# Altium PCB PCB1_wo_gnd_plane.PcbDoc (part 1 of 2)
Units mm, origin at the board's own origin, x right, y up, seen from the top; angles counter-clockwise.
Board outline 64 x 64 mm, 2 copper layers (Top Layer, Bottom Layer), stack 1.601 mm thick; 71 components, 44 nets, 225 pads, 58 vias.
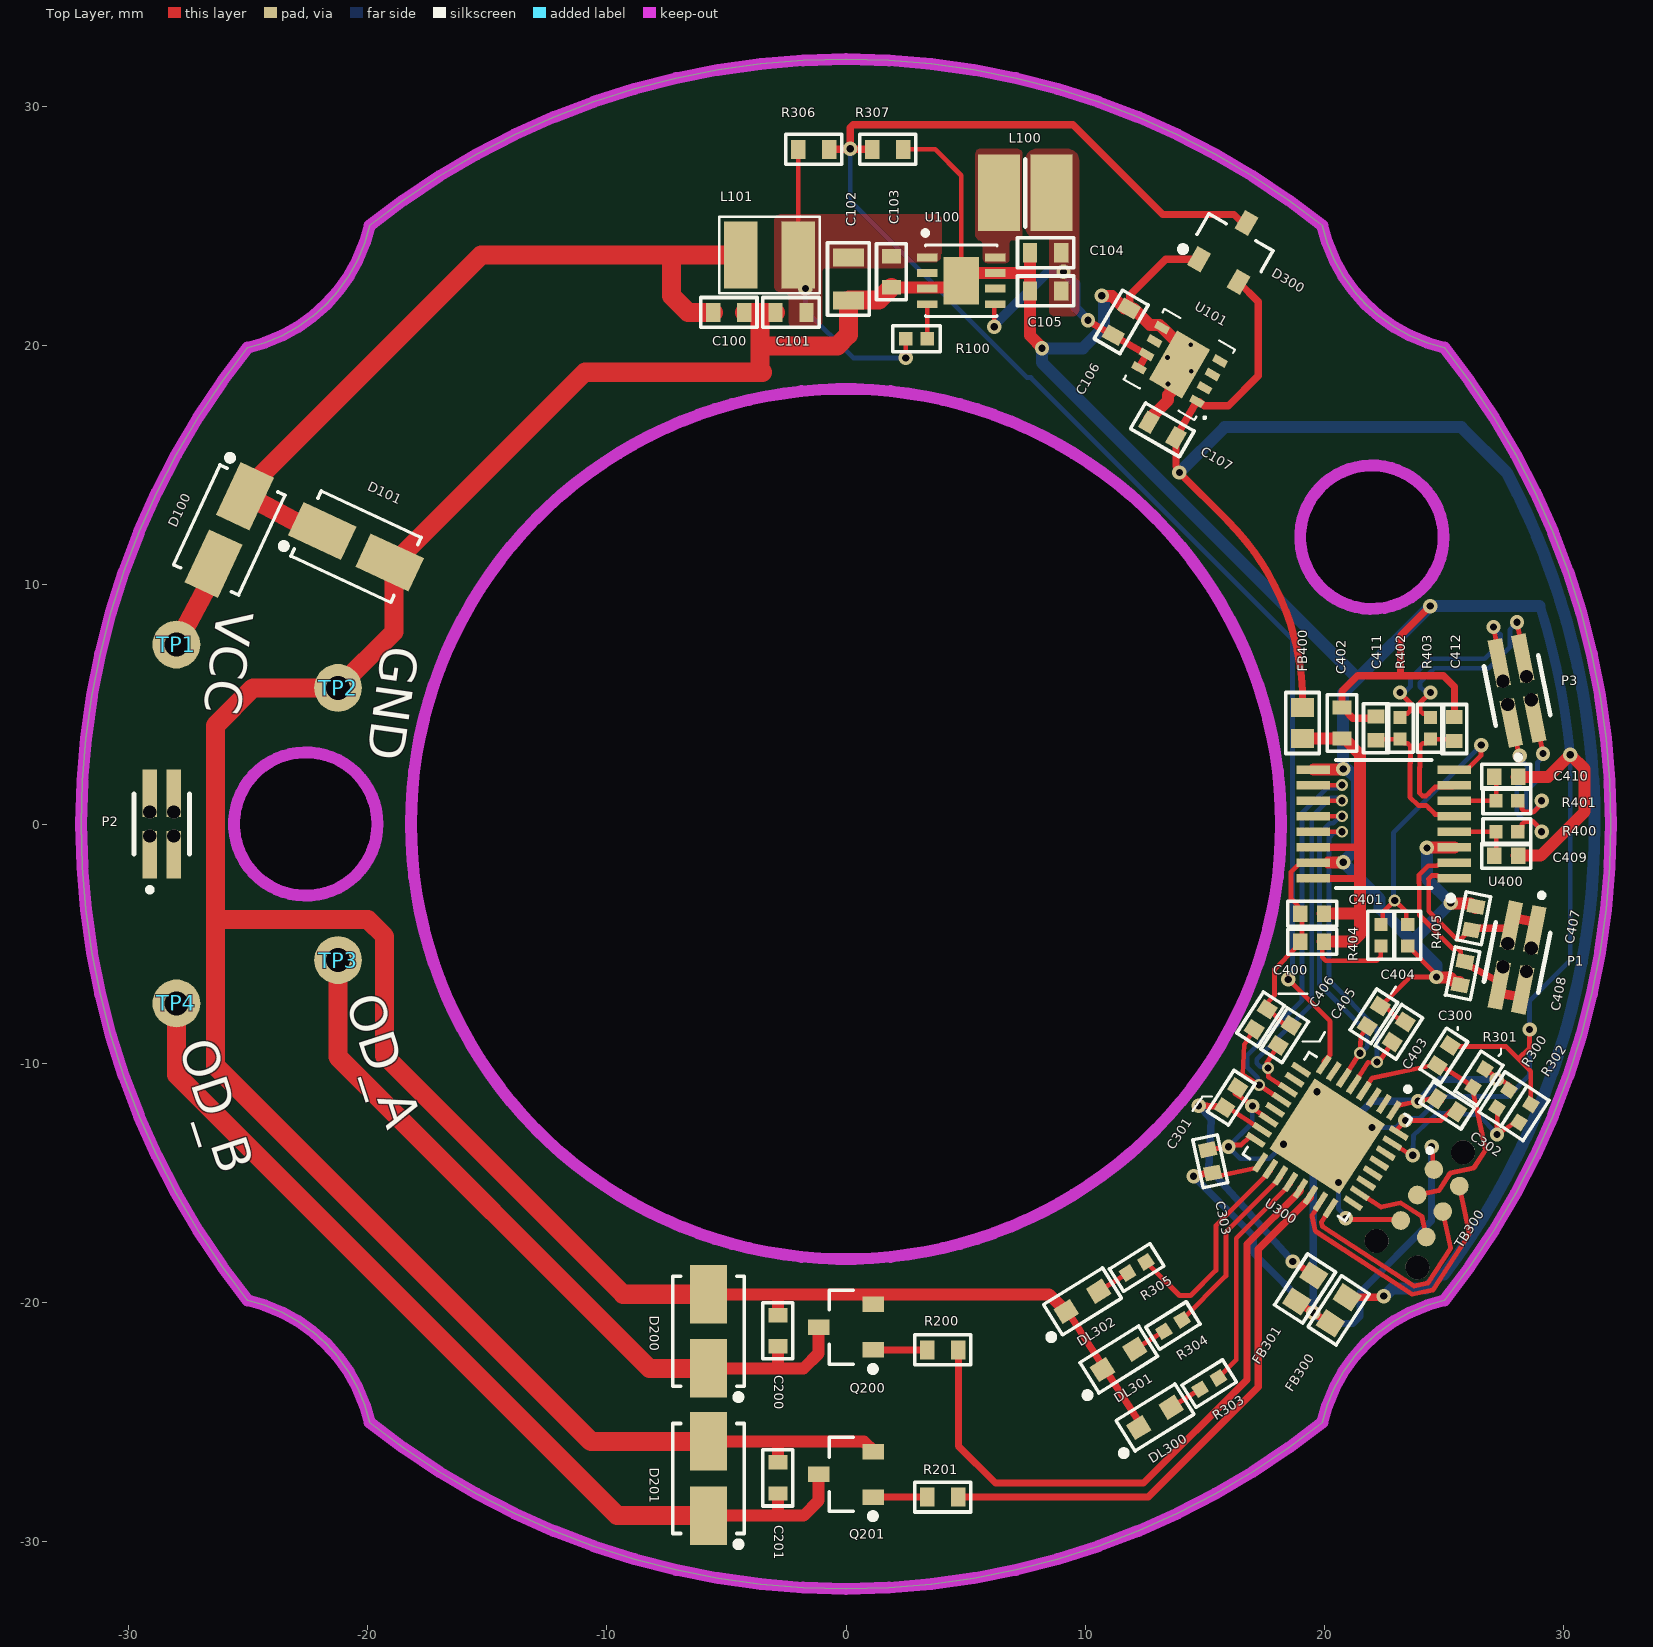
[diagram p0: Top Layer view]
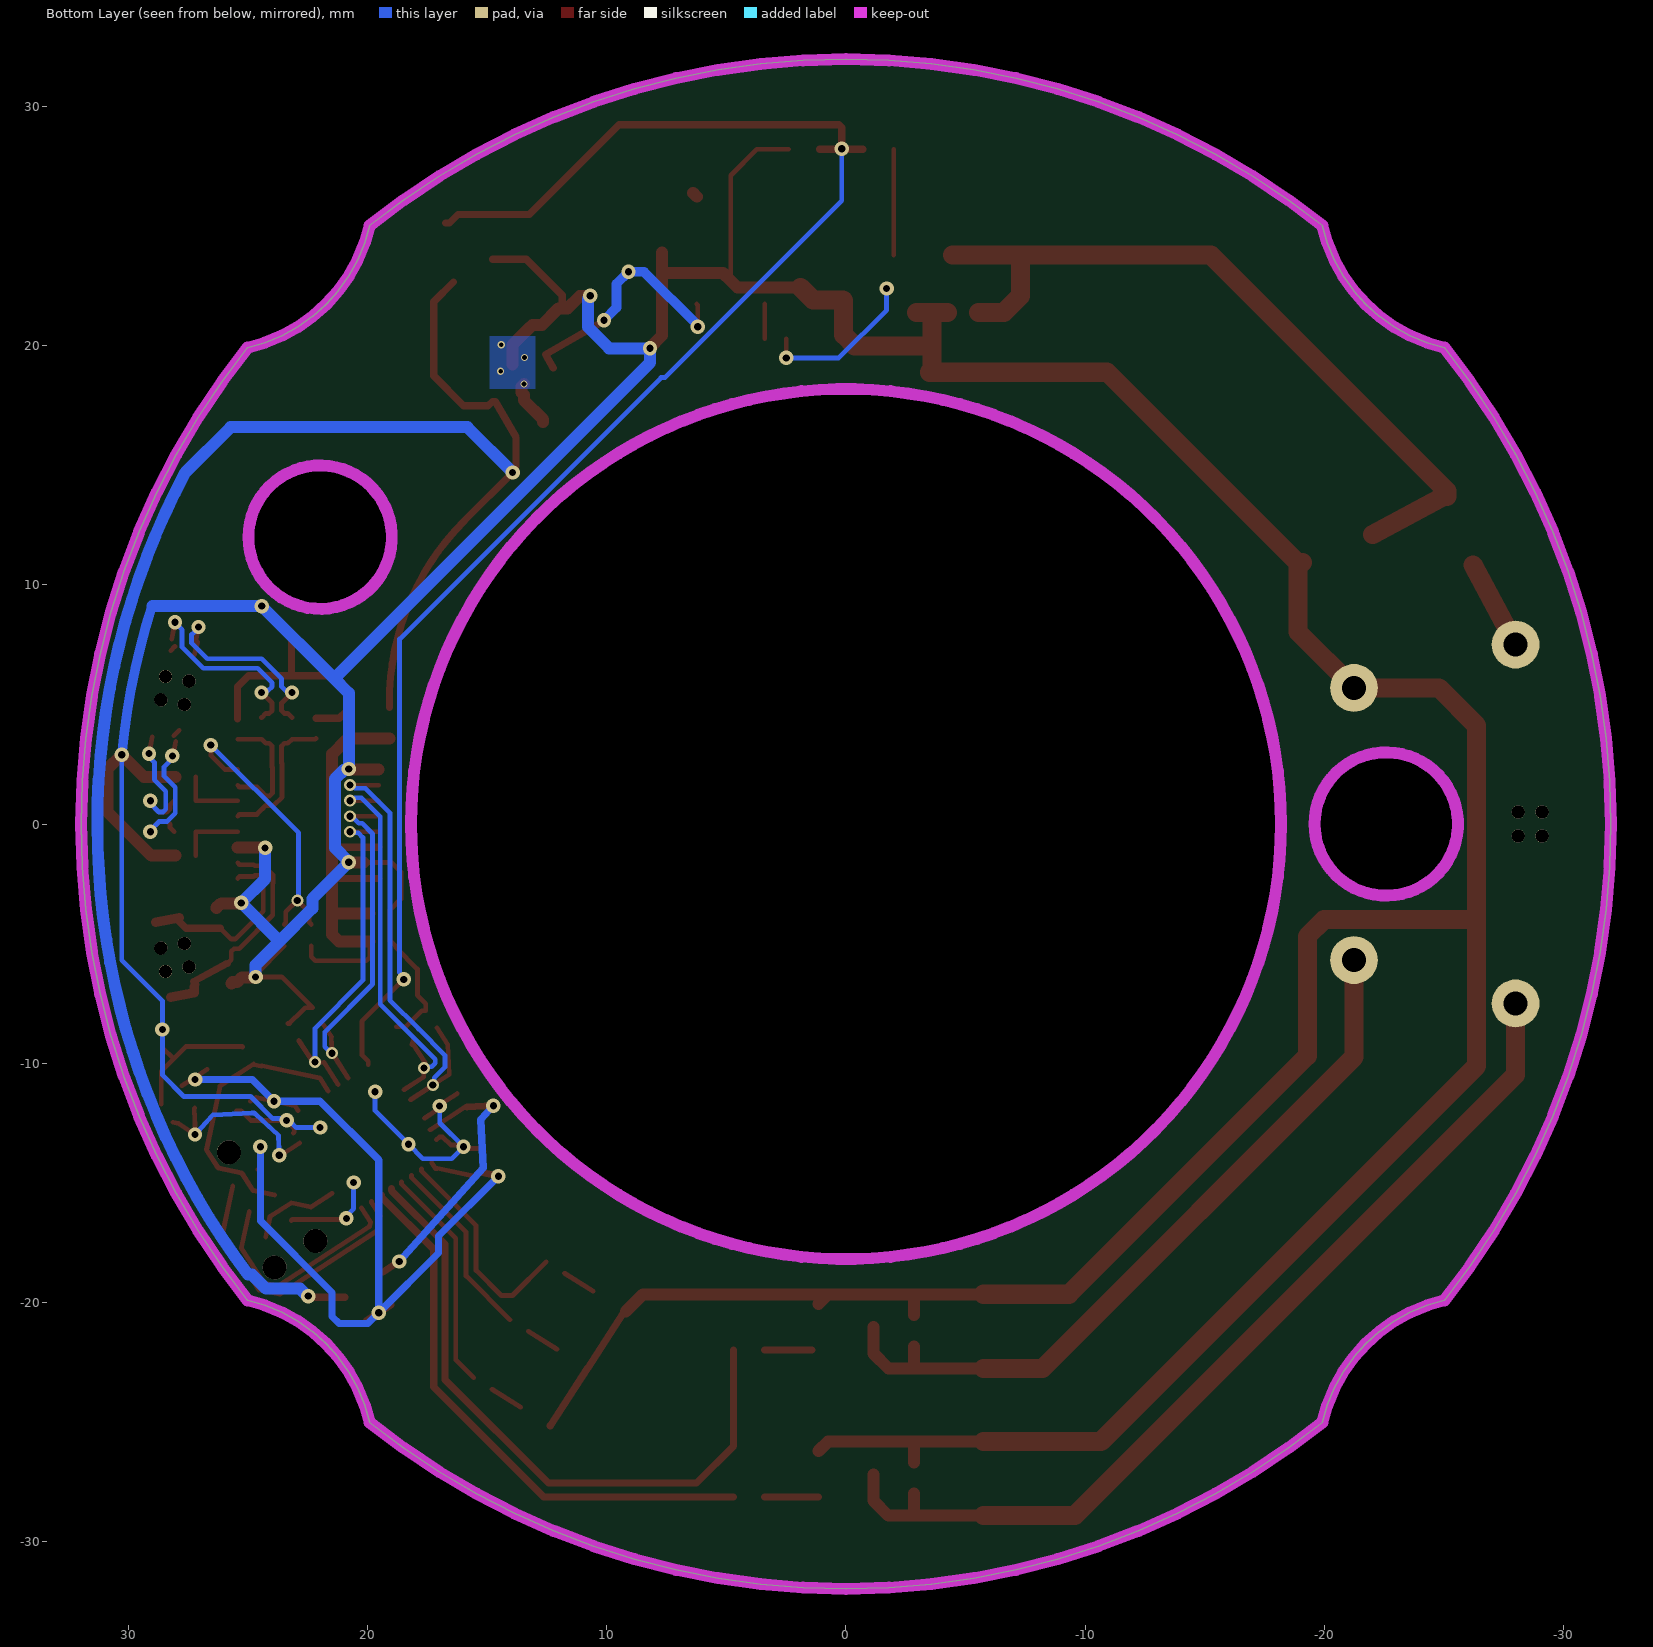
[diagram p1: Bottom Layer view, seen from below]

## Layer stack, top to bottom
Top Solder: solder mask 0.0102, Solder Resist, Dk 3.5
Top Layer: signal copper 0.0356
Dielectric 1: dielectric 1.53, FR-4, Dk 4.8
Bottom Layer: signal copper 0.0356
Bottom Solder: solder mask 0.0102, Solder Resist, Dk 3.5

## Board outline
21.744,21.744 21.237,22.311 20.797,22.932 20.429,23.599 20.14,24.303 19.931,25.035 18.498,26.112 17.006,27.107 15.462,28.017 13.868,28.839 12.232,29.57 10.556,30.209 8.848,30.752 7.112,31.2 5.354,31.549 3.578,31.799 1.792,31.95 0,32 -1.792,31.95 -3.579,31.799 -5.354,31.549 -7.112,31.2 -8.848,30.752 -10.557,30.209 -12.232,29.57 -13.868,28.839 -15.462,28.017 -17.006,27.107 -18.498,26.112 -19.931,25.035 -20.14,24.303 -20.43,23.599 -20.797,22.932 -21.237,22.311 -21.744,21.744 -22.311,21.237 -22.932,20.797 -23.599,20.429 -24.303,20.14 -25.035,19.931 -26.112,18.498 -27.107,17.006 -28.017,15.462 -28.839,13.868 -29.57,12.232 -30.209,10.557 -30.752,8.848 -31.2,7.112 -31.549,5.354 -31.799,3.579 -31.95,1.792 -32,0 -31.95,-1.792 -31.799,-3.579 -31.549,-5.354 -31.2,-7.112 -30.752,-8.848 -30.209,-10.557 -29.57,-12.232 -28.839,-13.868 -28.017,-15.462 -27.107,-17.006 -26.112,-18.498 -25.035,-19.931 -24.303,-20.14 -23.599,-20.429 -22.932,-20.797 -22.311,-21.237 -21.744,-21.744 -21.237,-22.311 -20.797,-22.932 -20.43,-23.599 -20.14,-24.303 -19.931,-25.035 -18.498,-26.112 -17.006,-27.107 -15.462,-28.017 -13.868,-28.839 -12.232,-29.57 -10.557,-30.209 -8.848,-30.752 -7.112,-31.2 -5.354,-31.549 -3.579,-31.799 -1.792,-31.95 0,-32 1.792,-31.95 3.578,-31.799 5.354,-31.549 7.112,-31.2 8.848,-30.752 10.556,-30.209 12.232,-29.57 13.868,-28.839 15.462,-28.017 17.006,-27.107 18.498,-26.112 19.931,-25.035 20.14,-24.303 20.429,-23.599 20.797,-22.932 21.237,-22.311 21.744,-21.744 22.311,-21.237 22.932,-20.797 23.599,-20.429 24.303,-20.14 25.035,-19.931 26.112,-18.498 27.107,-17.006 28.017,-15.462 28.839,-13.868 29.57,-12.232 30.209,-10.557 30.752,-8.848 31.2,-7.112 31.549,-5.354 31.799,-3.579 31.95,-1.792 32,0 31.95,1.792 31.799,3.579 31.549,5.354 31.2,7.112 30.752,8.848 30.209,10.557 29.57,12.232 28.839,13.868 28.017,15.462 27.107,17.006 26.112,18.498 25.035,19.931 24.303,20.14 23.599,20.429 22.932,20.797 22.311,21.237
cut-out: 19,12 ccw(c22,12) 22,9 ccw(c22,12) 25,12 ccw(c22,12) 22,15 ccw(c22,12)
cut-out: -22.6,-3 cw(c-22.6,0) -25.6,0 cw(c-22.6,0) -22.6,3 cw(c-22.6,0) -19.6,0 cw(c-22.6,0)
cut-out: 0,-18.2 cw(c0,0) -18.2,0 cw(c0,0) 0,18.2 cw(c0,0) 18.2,0 cw(c0,0)

## Design rules (kind name [scope] priority, off if disabled: settings)
Clearance [All] p1: gap=0.127 ignorepadtopadclearanceinfootprint=TRUE
DiffPairsRouting [All] p1: maxlimit=0.5 minlimit=0.2 mostfreqgap=0.3 toplayer_minwidth=0.2 toplayer_maxwidth=0.5 toplayer_prefwidth=0.2 bottomlayer_minwidth=0.2 bottomlayer_maxwidth=0.5 bottomlayer_prefwidth=0.2 maxuncoupledlength=12.7
MinimumSolderMaskSliver [All] p1: minsoldermaskwidth=0.127
PolygonConnect [All] p1: thpad.connectstyle=Relief thpad.reliefconductorwidth=0.254 thpad.reliefentries=4 thpad.polygonreliefangle="90 Angle" thpad.airgapwidth=0.254 smdpad.connectstyle=Relief smdpad.reliefconductorwidth=0.254 smdpad.reliefentries=4 smdpad.polygonreliefangle="90 Angle" smdpad.airgapwidth=0.254 via.connectstyle=Direct via.reliefconductorwidth=0.254 via.reliefentries=4 via.polygonreliefangle="90 Angle" via.airgapwidth=0.254
RoutingVias [All] p1: holewidth=0.7 width=1 viastyle="Through Hole" minholewidth=0.25 minwidth=0.5 maxholewidth=0.3 maxwidth=0.6
SilkToSilkClearance [All] p1: silktosilkclearance=0.127
SilkToSolderMaskClearance [IsPad] p1: minsilkscreentomaskgap=0.065 clearancetoexposedcopper=TRUE
SolderMaskExpansion [All] p1: expansion=0 istentingtop=FALSE
SupplyNets "Schematic Supply Nets_7" [InNet('Buck_Vin')] p1: voltage=0.000
SupplyNets "Schematic Supply Nets_6" [InNet('3V3_MCU')] p2: voltage=0.000
SupplyNets "Schematic Supply Nets_3" [InNet('VDDA_MCU')] p3: voltage=0.000
SupplyNets "Schematic Supply Nets_5" [InNet('3V3_LDC')] p4: voltage=0.000
SupplyNets "Schematic Supply Nets_4" [InNet('3V3')] p5: voltage=0.000
SupplyNets "Schematic Supply Nets_2" [InNet('GND')] p6: voltage=0.000
SupplyNets "Schematic Supply Nets_1" [InNet('V_SUPPLY')] p7: voltage=0.000
SupplyNets "Schematic Supply Nets" [InNet('5V')] p8: voltage=0.000
Width [All] p1: maxlimit=0.8 minlimit=0.2 preferedwidth=0.3 minimp=50.000000 maximp=50.000000 favimp=50.000000
26 further rules are at their usual default settings.

## Classes and differential pairs
component class MCU: C300 C301 C302 C303 D300 DL300 DL301 DL302 FB300 FB301 R300 R301 R302 R303 R304 R305 R306 R307 TB300 U300
component class COIL_IF: C400 C401 C402 C403 C404 C405 C406 C407 C408 C409 C410 C411 C412 FB400 R400 R401 R402 R403 R404 R405 U400
component class PWR: C100 C101 C102 C103 C104 C105 C106 C107 D100 D101 L100 L101 R100 U100 U101
component class OUT_DRV: C200 C201 D200 D201 Q200 Q201 R200 R201
component class main: P1 P2 P3 TP1 TP2 TP3 TP4
differential pair SIN: +SIN_P -SIN_N
differential pair RX_SIN_FILT: +RX_SIN_FILT_P -RX_SIN_FILT_N
differential pair RX_COS_FILT: +RX_COS_FILT_P -RX_COS_FILT_N
differential pair COS: +COS_P -COS_N
differential pair TX: +TX_P -TX_N
differential pair RX_SIN: +RX_SIN_P -RX_SIN_N
differential pair RX_COS: +RX_COS_P -RX_COS_N

## Components (designator, comment, footprint, x,y, rotation, side; value= is the part's Value field where it differs from the comment)
C100 "100nF" CER0603 -4.9,21.4 r0 top
C101 "100nF" CER0603 -2.3,21.4 r180 top
C102 "1uF" CER0805 0.1,22.8 r270 top
C103 "100nF" CER0603 1.9,23.1 r270 top
C104 "100nF" CER0603 8.35,23.9 r180 top
C105 "2.2uF" CER0603 8.35,22.3 r180 top
C106 "2.2uF" CER0603 11.514,21.006 r60 top
C107 "2.2uF" CER0603 13.237,16.49 r150 top
C200 "10nF" CER0603 -2.85,-21.2 r90 top
C201 "10nF" CER0603 -2.85,-27.356 r90 top
C300 "100nF" CER0402 25.011,-9.684 r57 top locked
C301 "100nF" CER0402 16.114,-11.449 r57 top locked
C302 "100nF" CER0402 25.144,-11.769 r327 top
C303 "100nF" CER0402 15.237,-14.111 r102 top locked
C400 "100nF" CER0402 19.5,-4.925 r180 top locked
C401 "10nF" CER0402 19.5,-3.75 r180 top locked
C402 "1uF" CER0603 20.75,4.225 r90 top
C403 "1nF" CER0402 23.127,-8.697 r57 top
C404 "1nF" CER0402 22.084,-8.042 r57 top
C405 "1nF" CER0402 18.35,-8.841 r57 top
C406 "1nF" CER0402 17.346,-8.169 r57 top
C407 "470pF" CER0402 26.256,-3.942 r78.75 top
C408 "470pF" CER0402 25.797,-6.25 r258.75 top
C409 "470pF" CER0402 27.625,-1.325 r0 top locked
C410 "470pF" CER0402 27.625,1.975 r0 top locked
C411 "470pF" CER0402 22.175,4 r90 top locked
C412 "470pF" CER0402 25.45,3.975 r90 top locked
D100 "Shottky Rect Diode SMD" DO-214AC_SMA -25.8,12.3 r245 top value=RBR1L60ADDTE25
D101 "SMD/PTH TVS Unidirectional Diode" DO-214AC_SMA -20.5,11.6 r335 top value=SMAJ28A
D200 "SMD/PTH TVS Unidirectional Diode" DO-214AC_SMA -5.75,-21.225 r90 top value="TVS 28V SMA"
D201 "SMD/PTH TVS Unidirectional Diode" DO-214AC_SMA -5.75,-27.381 r90 top value="TVS 28V SMA"
D300 "Double Schottky Diode, SOT23-3 series" SOT95P230X110-3N 16.175,24.15 r60 top value=BAT54S
DL300 "Single Color SMD LED" "LED SMD 0603" 12.926,-24.826 r32 top value=LEDR
DL301 "Single Color SMD LED" "LED SMD 0603" 11.409,-22.399 r32 top value=LEDG
DL302 "Single Color SMD LED" "LED SMD 0603" 9.892,-19.971 r32 top value=LEDG
FB300 "Value" FEB0603 20.613,-20.345 r237 top
FB301 "Value" FEB0603 19.209,-19.432 r57 top
FB400 "Value" FEB0603 19.1,4.225 r270 top
L100 "SMD Inductor" WE-MAPI_1212 7.5,26.4 r0 top value=3.3uH
L101 "SMD Inductor" WE-LQ_1210 -3.2,23.8 r0 top value=4.7uH
P1 "CLM-102-02-L-D-BE" SAMTEC_CLM-102-02-X-D-BE_SPECIAL 28.075,-5.584 r168.75 top locked
P2 "CLM-102-02-L-D-BE" SAMTEC_CLM-102-02-X-D-BE_SPECIAL -28.625,0 r0 top locked
P3 "CLM-102-02-L-D-BE" SAMTEC_CLM-102-02-X-D-BE_SPECIAL 28.075,5.584 r11.25 top locked
Q200 "NPN Transistor SMD" SOT95P230X110-3N 0,-21.05 r180 top value=BC847C-Q
Q201 "NPN Transistor SMD" SOT95P230X110-3N 0,-27.206 r180 top value=BC847C-Q
R100 "SMD Resistor" Res0402 2.95,20.3 r180 top value=10K
R200 "SMD Resistor" Res0603 4.05,-22 r180 top value=1k
R201 "SMD Resistor" Res0603 4.05,-28.156 r180 top value=1k
R300 "SMD Resistor" Res0402 27.486,-11.504 r57 top locked value=10K
R301 "SMD Resistor" Res0402 26.478,-10.637 r57 top locked value=10K
R302 "SMD Resistor" Res0402 28.405,-12.103 r237 top locked value=10K
R303 "SMD Resistor" Res0402 15.194,-23.409 r32 top value=249R
R304 "SMD Resistor" Res0402 13.678,-20.981 r32 top value=249R
R305 "SMD Resistor" Res0402 12.161,-18.554 r32 top value=249R
R306 "SMD Resistor" Res0603 -1.35,28.225 r180 top value=33K
R307 "SMD Resistor" Res0603 1.75,28.225 r180 top value=3K3
R400 "SMD Resistor" Res0402 27.65,-0.325 r180 top locked value=100R
R401 "SMD Resistor" Res0402 27.65,0.975 r180 top locked value=100R
R402 "SMD Resistor" Res0402 23.175,4 r270 top locked value=100R
R403 "SMD Resistor" Res0402 24.45,4 r270 top locked value=100R
R404 "SMD Resistor" Res0402 22.375,-4.65 r270 top value=1K
R405 "SMD Resistor" Res0402 23.5,-4.65 r90 top value=1K
TB300 "TC2030_NL" TC2030_NL 24.594,-14.457 r237 top locked value=TC2030-NL
TP1 "Term Pole" "Terminale 508-0685_2mm" -28.012,7.506 r345 top
TP2 "Term Pole" "Terminale 508-0685_2mm" -21.25,5.694 r75 top
TP3 "Term Pole" "Terminale 508-0685_2mm" -21.25,-5.694 r105 top
TP4 "Term Pole" "Terminale 508-0685_2mm" -28.012,-7.506 r105 top
U100 "ONSEMI_NCV890430" SON65P300X300X100-9N 4.82,22.725 r0 top value=NCV890430
U101 "TI_TPS78533Q_VSON" SON65P300X100_HS-9N 13.95,19.225 r150 top value=TPS78433-Q1
U300 "STM32G431K8U6" QFN50P500X500X60-33N 20.128,-13.071 r237 top locked value=STM32G431
U400 "LDC5072EPWRQ1" TSSOP16-PW_TEX 22.5,0 r180 top locked value=LDC5072

## Footprints (in the part's own frame and the unit in brackets; to place one, negate y for a bottom-side part, rotate by r counter-clockwise, add the part's x,y. Pads: shape width x height; smd on the part's side, far side on the other; paste and mask are expansions set on the pad)
CER0402 [mm] "CAPC1005X04N"
  rect 0.6x0.7 smd: 1(-0.5,0) 2(0.5,0)
  silkscreen extent -1.03,-0.53 1.03,0.53, body extent -0.5,-0.3 0.5,0.3, height 0.19
CER0603 [mm] "CAPC1608X05N"
  rect 0.6x0.8 smd: 1(-0.65,0) 2(0.65,0)
  silkscreen extent -1.17,-0.63 1.17,0.63, body extent -0.8,-0.4 0.8,0.4, height 0.29
CER0805 [mm]
  rect 0.76x1.3 smd: 1(-0.9,0) 2(0.9,0)
  silkscreen extent -1.53,-0.87 1.52,0.87, body extent -1,-0.62 1,0.63, height 0.77
DO-214AC_SMA [mm] "Molded Diode, 2-Leads, Body 4,30x2,60mm, IPC Medium Density"
  rect 2.45x1.55 smd: 1(-1.55,0) 2(1.55,0)
  silkscreen extent -2.87,-1.5 2.3,1.5, body extent -2.75,-1.4 2.75,1.4, height 2.6
FEB0603 [mm] "FEBC1608X05N"
  rect 0.8x0.95 smd: 1(-0.65,0) 2(0.65,0)
  silkscreen extent -1.28,-0.7 1.28,0.7, body extent -0.8,-0.4 0.8,0.4, height 0.79
"LED SMD 0603" [mm] "LED 0603(1.6x0.8mm)"
  rect 0.8x0.75 smd: 1(-0.8,0) 2(0.8,0)
  silkscreen extent -2.02,-0.75 1.45,0.75, body extent -0.85,-0.45 0.85,0.45, height 0.9
QFN50P500X500X60-33N [mm]
  rrect25% 0.86x0.25 smd: 1(-2.435,1.75) 2(-2.435,1.25) 3(-2.435,0.75) 4(-2.435,0.25) 5(-2.435,-0.25) 6(-2.435,-0.75) 7(-2.435,-1.25) 8(-2.435,-1.75) 17(2.435,-1.75) 18(2.435,-1.25) 19(2.435,-0.75) 20(2.435,-0.25) 21(2.435,0.25) 22(2.435,0.75) 23(2.435,1.25) 24(2.435,1.75)
  rrect25% 0.25x0.86 smd: 9(-1.75,-2.435) 10(-1.25,-2.435) 11(-0.75,-2.435) 12(-0.25,-2.435) 13(0.25,-2.435) 14(0.75,-2.435) 15(1.25,-2.435) 16(1.75,-2.435) 25(1.75,2.435) 26(1.25,2.435) 27(0.75,2.435) 28(0.25,2.435) 29(-0.25,2.435) 30(-0.75,2.435) 31(-1.25,2.435) 32(-1.75,2.435)
  rect 3.5x3.5 smd paste-0.64: 33(0,0)
  silkscreen extent -3.59,-2.55 2.55,2.55, body extent -2.5,-2.5 2.5,2.5, height 0.6
Res0402 [mm] "RESC1005X04N"
  rect 0.55x0.55 smd: 1(-0.45,0) 2(0.45,0)
  silkscreen extent -1,-0.55 1,0.55, body extent -0.5,-0.25 0.5,0.25, height 0.34
Res0603 [mm] "RESC1608X05N"
  rect 0.6x0.8 smd: 1(-0.65,0) 2(0.65,0)
  silkscreen extent -1.17,-0.63 1.17,0.63, body extent -0.8,-0.4 0.8,0.4, height 0.44
SAMTEC_CLM-102-02-X-D-BE_SPECIAL [mm]
  rect 0.61x2 smd paste+0 mask+0.102: 01(-0.5,-1.286) 02(-0.5,1.286) 03(0.5,-1.286) 04(0.5,1.286)
  round 0.559 hole 0.559 mask+0: 01(-0.5,-0.5) 02(-0.5,0.5) 03(0.5,-0.5) 04(0.5,0.5)
  silkscreen extent -1.16,-2.85 1.16,1.27, body extent -1.16,-1.91 1.16,1.91, height 2.22
SON65P300X100_HS-9N [mm] "SON, 8-Leads, Body 3,00x3,00mm, Pitch 0,65mm, Thermal Pad 2,37x1,60mm, IPC Medium Density"
  rect 0.6x0.32 smd: 1(-1.4,0.975) 2(-1.4,0.325) 3(-1.4,-0.325) 4(-1.4,-0.975) 5(1.4,-0.975) 6(1.4,-0.325) 7(1.4,0.325) 8(1.4,0.975)
  rect 1.6x2.37 smd paste-2539.97: 9(0,0)
  silkscreen extent -2.07,-1.7 1.7,1.7, body extent -1.49,-1.49 1.51,1.51, height 1
SON65P300X300X100-9N [mm]
  rrect5% 0.87x0.32 smd paste+0 mask+0: 1(-1.42,0.975) 2(-1.42,0.325) 3(-1.42,-0.325) 4(-1.42,-0.975) 5(1.42,-0.975) 6(1.42,-0.325) 7(1.42,0.325) 8(1.42,0.975)
  rect 1.47x2 smd paste-2 mask+0.05: 9(0,0)
  silkscreen extent -1.6,-1.5 1.5,2.1, body extent -1.5,-1.5 1.5,1.5, height 1
SOT95P230X110-3N [mm] "SOT23-3"
  rect 0.9x0.65 smd: 1(-1.15,0.95) 2(-1.15,-0.95) 3(1.15,0)
  silkscreen extent -1.25,-1.55 0.7,1.87, body extent -1.5,-1.5 1.5,1.5, height 1.3
TC2030_NL [mm]
  round 0.78 smd paste-1: 1(0,0) 2(0,1.27) 3(1.27,0) 4(1.27,1.27) 5(2.54,0) 6(2.54,1.27)
  round 1 hole 1 unplated: ""(-1.27,0.635) ""(3.81,-0.385) ""(3.81,1.655)
  silkscreen extent -0.63,-0.63 -0.52,-0.52
"Terminale 508-0685_2mm" [mm] "Terminale sonda TH"
  round 2 hole 1: 1(0,0)
TSSOP16-PW_TEX [mm]
  rect 1.404x0.355 smd paste+0 mask+0: 1(-2.95,2.275) 2(-2.95,1.625) 3(-2.95,0.975) 4(-2.95,0.325) 5(-2.95,-0.325) 6(-2.95,-0.975) 7(-2.95,-1.625) 8(-2.95,-2.275) 9(2.95,-2.275) 10(2.95,-1.625) 11(2.95,-0.975) 12(2.95,-0.325) 13(2.95,0.325) 14(2.95,0.975) 15(2.95,1.625) 16(2.95,2.275)
  silkscreen extent -2.9,-2.68 2,3.2, body extent -3.3,-2.55 3.3,2.55, height 1.2
WE-LQ_1210 [mm] "SMT Inductor, body 3.2x2.5mm"
  rect 1.4x2.8 smd: 1(-1.2,0) 2(1.2,0)
  silkscreen extent -2.1,-1.6 2.1,1.6, body extent -1.6,-1.25 1.6,1.25, height 1.99
WE-MAPI_1212 [mm]
  rect 1.75x3.2 smd: 1(-1.1,0) 2(1.1,0)
  silkscreen extent 0,-1.4 0,1.4, body extent -1.5,-1.5 1.5,1.5, height 1

## Part data
C100 C101 C103 C104: library part GCM188L81H104KA57D, "MLCC Automotive, 100nF, 0603, 50V, 10%, X8L", Case/Package=0603, Dielectric=X8L, Max Op# temp °C=150, Min Op# Temp °C=-55, MPN2=GCJ188L8EL104KA07, Op Voltage=50V, Supplier Part Number=81-GCM188L81H104KA7D, Tolerance=10%, Datasheet URL=https://www.mouser.it/datasheet/2/281/1/GCM188L81H104KA57_01A-3144042.pdf, MFG1=MURATA, MFG2=MURATA, MPN1=GCM188L81H104KA57D, Qualification=AEC-Q200, Supplier=Mouser, Supplier URL=https://www.mouser.it/ProductDetail/Murata-Electronics/GCM188L81H104KA57J?qs=yTuLhIm%2Fv1CdnQNNqnCjYQ%3D%3D, Technology="Powertrain/Safety for Automotive", Termination="Soft (GCJ)"
C102: library part KAM21KR71H105KL, "MLCC Automotive, 1uF, 0805, 50V, 10%, X7R", Case/Package=0805, Dielectric=X7R, Max Op# temp °C=125, Min Op# Temp °C=-55, Op Voltage=50V, Supplier Part Number=581-KAM21KR71H105KL, Tolerance=10%, Datasheet URL=https://www.mouser.it/datasheet/2/40/AutoMLCC-2952695.pdf, MFG1=KYOCERA-AVX, MPN1=KAM21KR71H105KL, Qualification=AEC-Q200, Supplier=Mouser, Supplier URL=https://www.mouser.it/ProductDetail/KYOCERA-AVX/08055C105K4T4A?qs=byeeYqUIh0Oh891bMlItEA%3D%3D, Technology="Powertrain/Safety for Automotive"
C105 C106 C107: library part GRT188C71C225KE13D, "MLCC Automotive, 2.2uF, 0603, 16V, 10%, X7S", Case/Package=0603, Dielectric=X7S, Max Op# temp °C=125, Min Op# Temp °C=-55, Op Voltage=16V, Supplier Part Number=81-GRT188C71C225KE3D, Tolerance=10%, Datasheet URL=https://www.mouser.it/datasheet/3/76/1/GRT188C71C225KE13_01A.pdf, MFG1=MURATA, MPN1=GRT188C71C225KE13D, Qualification=AEC-Q200, Supplier=Mouser, Supplier URL=https://www.mouser.it/it/ProductDetail/Murata-Electronics/GRT188C71C225KE13D?qs=hd1VzrDQEGhlNcWcmqnE6Q%3D%3D
C200 C201: library part GCM188R72A103KA37, "MLCC Automotive, 10nF, 0603, 100V, 10%, X7R", Case/Package=0603, Dielectric=X7R, Max Op# temp °C=125, Min Op# Temp °C=-55, Op Voltage=100V, Supplier Part Number=81-GCM188R72A103KA7D, Tolerance=10%, Datasheet URL=https://www.mouser.it/datasheet/2/281/1/GCM188R72A103KA37_01C-3144519.pdf, MFG1=MURATA, MPN1=GCM188R72A103KA37, Qualification=AEC-Q200, Supplier=Mouser, Supplier URL=https://www.mouser.it/ProductDetail/Murata-Electronics/GCM188R72A103KA37D?qs=aEuGZpxfbxXMjTExujWHsg%3D%3D, Technology="Powertrain/Safety for Automotive"
C300 C301 C302 C303 C400: library part GCM155R71H104KE02D, "MLCC Automotive, 100nF, 0402, 50V, 10%, X7r", Case/Package=0402, Dielectric=X7R, Max Op# temp °C=125, Min Op# Temp °C=-55, MPN2=GCM155R71H104KE37, Op Voltage=50V, Supplier Part Number=81-GCM155R71H104KE2D, Tolerance=10%, Datasheet URL=https://www.mouser.it/datasheet/2/281/1/GCM155R71H104KE02_01A-3142168.pdf, MFG1=MURATA, MFG2=MURATA, MPN1=GCM155R71H104KE02D, Qualification=AEC-Q200, Supplier=Mouser, Supplier URL=https://www.mouser.it/ProductDetail/Murata-Electronics/GCM155R71H104KE02D?qs=hNud%2FORuBR2sLZsqfoz4Fw%3D%3D, Technology="Powertrain/Safety for Automotive"
C401: library part GCM155R71H103KA55*, "MLCC Automotive, 10nF, 0402, 25V, 10%, X7r", Case/Package=0402, Dielectric=X7R, Max Op# temp °C=125, Min Op# Temp °C=-55, Op Voltage=50V, Supplier Part Number=81-GCM155R71H103KA5J, Tolerance=10%, Datasheet URL=https://www.mouser.it/datasheet/2/281/1/GCM155R71H103KA55_01A-3142380.pdf, MFG1=MURATA, MPN1=GCM155R71H103KA55*, Qualification=AEC-Q200, Supplier=Mouser, Supplier URL=https://www.mouser.it/ProductDetail/Murata-Electronics/GCM155R71H103KA55J?qs=N3Kl9KD794RolAwdnyzU1Q%3D%3D, Technology="Powertrain/Safety for Automotive"
C402: library part GCM188R71C105KA64J, "MLCC Automotive, 1uF, 0603, 16V, 10%, X7R", Case/Package=0603, Dielectric=X7R, Max Op# temp °C=125, Min Op# Temp °C=-55, MPN2=C0603C105K4RACAUTO, Op Voltage=16V, Supplier Part Number=81-GCM188R71C105KA4J, Tolerance=10%, Datasheet URL=https://www.mouser.it/datasheet/2/281/1/GCM188R71C105KA64_04A-3143889.pdf, MFG1=MURATA, MFG2=KEMET, MPN1=GCM188R71C105KA64J, Qualification=AEC-Q200, Supplier=Mouser, Supplier URL=https://www.mouser.it/ProductDetail/Murata-Electronics/GCM188R71C105KA64J?qs=4%252BGqC78dy0BN5WaW5TLgXw%3D%3D, Technology="Powertrain/Safety for Automotive"
C403 C404 C405 C406: library part GRT1555C1E102JA02J, "MLCC Automotive, 1nF, 0402, 25V, 10%, COG", Case/Package=0402, Dielectric=C0G, Max Op# temp °C=125, Min Op# Temp °C=-55, Op Voltage=25V, Supplier Part Number=81-GRT1555C1E102JA2J, Tolerance=5%, Datasheet URL=https://www.mouser.it/datasheet/3/76/4/GRT1555C1E102JA02_01A.pdf, MFG1=MURATA, MPN1=GRT1555C1E102JA02J, Qualification=AEC-Q200, Supplier=Mouser, Supplier URL=https://www.mouser.it/it/ProductDetail/Murata-Electronics/GRT1555C1E102JA02J?qs=sGAEpiMZZMvsSlwiRhF8qtsGU%2FCnaNeQokeRzBpVly3nnJVQ2ndM9w%3D%3D
C407 C408 C409 C410 C411 C412: library part GCM1555C1H471JA16, "MLCC Automotive, 470pF, 0402, 50V, 5%, COG", Case/Package=0402, Dielectric=COG, Max Op# temp °C=125, Min Op# Temp °C=-55, Op Voltage=50V, Supplier Part Number=81-GCM1555C1H471JA6J, Tolerance=5%, MFG1=MURATA, MPN1=GCM1555C1H471JA16, Qualification=AEC-Q200, Supplier=Mouser, Supplier URL=https://www.mouser.it/ProductDetail/Murata-Electronics/GCM1555C1H471JA16J?qs=N3Kl9KD794TXvw4%2Fs7azFA%3D%3D, Technology="Powertrain/Safety for Automotive"
D100: library part RBR1L60ADDTE25, "Schottky Rectifier Diode 1A 60V SMA", Case/Package=SMA(DO-214AC), Max Op# temp °C=150, Min Op# Temp °C=-55, Supplier Part Number=755-RBR1L60ADDTE25, Datasheet URL=https://www.rohm.com/datasheet?p=RBR1L60ADD&dist=Mouser&media=referral&source=mouser.com&campaign=Mouser, If (A)=1A, MFG1=ROHM, MPN1=RBR1L60ADDTE25, Qualification=AEC-Q101, Supplier=Mouser, Supplier URL=https://www.mouser.it/it/ProductDetail/ROHM-Semiconductor/RBR1L60ADDTE25?qs=4v%252BiZTmLVHHPf04ac7QKmA%3D%3D, Vreverse=60V
D101: library part SMAJ28A-13-F, "TVS Unidir 28V SMA", MPN1=SMAJ28A-13-F
D200 D201: library part SMA6T28AY, "TVS Uniir 28V SMA", 8/20us Power=4KW, 10/1000us Power=0.6Kw, Case/Package=SMA/DO-214AC, Max Op# temp °C=150, Min Op# Temp °C=-55, Stand-Off Voltage=24V, Supplier Part Number=511-SMA6T28AY, Datasheet URL=https://www.mouser.it/datasheet/2/389/sma6ty-1850088.pdf, MFG1=ST, MPN1=SMA6T28AY, Qualification=AEC-Q101, Supplier=Mouser, Supplier URL=https://www.mouser.it/ProductDetail/STMicroelectronics/SMAJ30A-TR?qs=zr%2F4QzOm779pW41kykOibw%3D%3D, Type=Unidirectional
D300: library part BAT54S, "Dual Schottky Diode,  Dual Series, SOT23, 0.2A, 30V", Case/Package="SOT323-3 (SC70)", MPN2=BAT54SLT1G, If (A)=0.2, MFG1=NEXPERIA, MFG2=OnSemi, MPN1=BAT54S, Type="Dual Series A1K2C", Vreverse=30V
DL300: library part SML-D12U8WT86C, "LED standard - SMD Red 620nm 63mcd 2.2 V, 20mA, 0603 AECQ-102", Case/Package="0603-Top View", Color="red 620nm", Max Current@ Tmax=4mA, Max Op# temp °C=100, Min Op# Temp °C=-40, Power Diss (mW)=54mW, Supplier Part Number=755-SML-D12U8WT86C, Datasheet URL=https://fscdn.rohm.com/en/products/databook/datasheet/opto/led/chip_mono/sml-d12u8wt86(c)-e.pdf, MFG1=ROHM, MPN1=SML-D12U8WT86C, Qualification=AEC-Q101, Supplier=Mouser, Supplier URL=https://www.mouser.it/ProductDetail/ROHM-Semiconductor/SML-D12U8WT86C?qs=HXFqYaX1Q2wNcb%2FPJz96zg%3D%3D, Technology=SM, Vf="2V @4mA"
DL301 DL302: library part SML-D12P8WT86C, "LED standard - SMD Grn 560nm 6.3mcd 2.2 V, 20mA, 0603 AECQ-102", Case/Package="0603-Top View", Color="Green 560nm", Max Current@ Tmax=4mA, Max Op# temp °C=100, Min Op# Temp °C=-40, Power Diss (mW)=54mW, Supplier Part Number=755-SML-D12P8WT86C, Datasheet URL=https://fscdn.rohm.com/en/products/databook/datasheet/opto/led/chip_mono/sml-d12p8wt86(c)-e.pdf, MFG1=ROHM, MPN1=SML-D12P8WT86C, Qualification=AEC-Q101, Supplier=Mouser, Supplier URL=https://www.mouser.it/ProductDetail/ROHM-Semiconductor/SML-D12P8WT86C?qs=HXFqYaX1Q2wFepzn1zWRrg%3D%3D, Technology=SM, Vf="2V @4mA"
FB300 FB301 FB400: library part BLM18HE601SH1D, "SMD EMI Suppression Ferrite Bead 600R, 0603, For DC Power", Case/Package=0603, Max Op# temp °C=125, Min Op# Temp °C=-55, Rated Current @85°C=0.8A, Rated Current @125°C=0.6A, Supplier Part Number=81-BLM18HE601SH1D, Datasheet URL=https://www.murata.com/products/productdata/8796199452702/QNFA9104.pdf?1539737628000, DCR (mR)=125, Impedence @1GHz=600R, Impedence @100MHz=600R, MFG1=MURATA, MPN1=BLM18HE601SH1D, Supplier=Mouser, Supplier URL=https://www.mouser.it/ProductDetail/Murata-Electronics/BLM18HE601SH1D?qs=d0WKAl%252BL4KZJDOgHon8ecQ%3D%3D, Technology=AEC-Q200
L100: library part 74438333033, "Power Inductors - SMD WE-MAPI 3,3uH 1.1A DCR=266mOhms AECQ200", Case/Package=1212, Max Op# temp °C=125, Min Op# Temp °C=-40, Rated Current (mA)=1.85, Rated Voltage=80, Sat Current (mA)=2.05, Supplier Part Number=710-74438333033, Datasheet URL=https://www.we-online.com/components/products/datasheet/74438333033.pdf, DCR (mR)=266mOhm, Fres (MHz)=38, MFG1=WE, MPN1=74438333033, Qualification=AEC-Q200, Supplier=Mouser, Supplier URL=https://www.mouser.it/it/ProductDetail/Wurth-Elektronik/74438333033?qs=ZB8tH5z5N7YH5nN%252BUBdrEg%3D%3D, Technology=SMD
L101: library part 744032004, "EMI Filtering Inductor WE-LQ SMT, 4.7uH, 490mA,", Case/Package=1210, Max Op# temp °C=125, Min Op# Temp °C=-40, Rated Current (mA)=490, Sat Current (mA)=1250, Supplier Part Number=710-744032004, Datasheet URL=https://www.we-online.com/components/products/datasheet/744032004.pdf, DCR (mR)=280mOhm, MFG1=WE, MPN1=744032004, Supplier=Mouser, Supplier URL=https://www.mouser.it/it/ProductDetail/Wurth-Elektronik/744032004?qs=XJfXErqHgA4qekdNbV2MtQ%3D%3D, Technology=SMD
P1 P2 P3: "Samtech Female header 2x2,pitch 1mm", Max Op# temp °C=125, Min Op# Temp °C=-55, Package=None, Supplier Part Number=200-CLM10202LDBE, Availability=Unavailable, ConnType="Board 2 Board", Datasheet URL=https://www.mouser.it/datasheet/3/85/1/clm_sm.pdf, MF=Samtec, MFG1=Samtec, Mount=SMD, MP=TSW-108-07-G-S, MPN1=CLM-102-02-L-D-BE, Orientation=Vertical, Pins=4, Pitch=1mm, Price=None, Supplier=Mouser, Supplier URL=https://www.mouser.it/it/ProductDetail/Samtec/CLM-102-02-L-D-BE?qs=rU5fayqh%252BE2B%252BzS%2F4mx9aQ%3D%3D
Q200 Q201: library part NEXPERIA, "NPN general purpose transistors", Case/Package=SOT23-3, Max Op# temp °C=150, Min Op# Temp °C=-65, MPN1=BC847C-QR, MPN2=BC847C-Q, Power Diss (mW)=250, Supplier Part Number=771-BC847C-QR, Hfe (min)=520, Ic (mA)=100, Manufacturer URL=https://www.nexperia.com/search?q=BC847C-Q&searchCategory=, MFG1=NEXPERIA, MFG2=Diodes, Qualification=AEC-Q101, Supplier=Mouser, Supplier URL=https://www.mouser.it/ProductDetail/Nexperia/BC847C-QR?qs=e8oIoAS2J1RqA3Lgar2wrA%3D%3D, Type=NPN, Vce Max (V)=45
R100 R300 R301 R302: library part CRCW040210K0FKED, "Thick Film SM Chip Resistors, 10K, 0402, ±1%, 1/10W", Case/Package=0402, Max Op# temp °C=155, Min Op# Temp °C=-55, Power=63mW, Supplier Part Number=71-CRCW0402-10K-E3, Temp# Coeffiient (PPM/C)=100, Tolerance=1%, MFG1=VISHAY, MPN1=CRCW040210K0FKED, Qualification=AEC-Q200, Supplier=Mouser, Supplier URL=https://www.mouser.it/ProductDetail/Vishay-Dale/CRCW040210K0FKED?qs=rlE3Te1NifyN3e8vvxacSw%3D%3D, Technology="Thick Film"
R200 R201: library part ERJ-UP6D1001V, "Thick Film SM Chip Resistors, 1K, 0805, ±0.5%, 1/2W", Case/Package=0805, Max Op# temp °C=155, Min Op# Temp °C=-55, Power=500mW, Supplier Part Number=667-ERJ-UP6D1001V, Temp# Coeffiient (PPM/C)=100, Tolerance=0.5%, Datasheet URL=https://www.mouser.com/catalog/specsheets/Panasonic_03-31-2024_Resistor_Anti-Sulfur(ERJ-UP6D-Series).pdf?_gl=1*1e8nwi8*_gcl_aw*R0NMLjE3Njc5NTQ2NTkuQ2p3S0NBaUE2NExMQmhCaEVpd0EtUHhndXhkNEYtbVB4TUc1OThEMlhWWVZvVEZGVXVGM1djYmUtdlk1a3VMZFRfZGNHclBMelhFSjRSb0NH, MFG1=PANASONIC, MPN1=ERJ-UP6D1001V, Qualification=AEC-Q200, Supplier=Mouser, Supplier URL=https://www.mouser.it/ProductDetail/Panasonic/ERJ-UP6D1001V?qs=sGAEpiMZZMvdGkrng054t2cqbZCzJY7NErLgAwiDoTXwln0CjOTO8w%3D%3D, Technology="Thick Film"
R303 R304 R305: library part TNPW0402249RBYEP, "Thick Film SM Chip Resistors, 249R, 0402, ±0.1%, 10ppm 1/16W", Case/Package=0402, Max Op# temp °C=155, Min Op# Temp °C=-55, Power=63mW, Supplier Part Number=71-TNPW0402249RBYEP, Temp# Coeffiient (PPM/C)=10, Tolerance=0,1%, MFG1=VISHAY, MPN1=TNPW0402249RBYEP, Qualification=AEC-Q200, Supplier=Mouser, Supplier URL=https://www.mouser.it/ProductDetail/Vishay-Dale/TNPW0402249RBYEP?qs=iLbezkQI%252Bsgmf6IA3nvojA%3D%3D, Technology="Thick Film"
R306: library part CRCW060333K0FKEA, "Thick Film SM Chip Resistors, 33K, 0603, ±1%, 1/10W", Case/Package=0603, Max Op# temp °C=155, Min Op# Temp °C=-55, Power=100mW, Supplier Part Number=71-CRCW0603-33K-E3, Temp# Coeffiient (PPM/C)=100, Tolerance=1%, MFG1=VISHAY, MPN1=CRCW060333K0FKEA, Qualification=AEC-Q200, Supplier=Mouser, Supplier URL=https://www.mouser.it/ProductDetail/Vishay-Dale/CRCW060333K0FKEA?qs=lRdAfIXKPc%2FlOd6gcmC8oQ%3D%3D, Technology="Thick Film"
R307: library part CRCW06033K30FKEA, "Thick Film SM Chip Resistors, 3K3, 0603, ±1%, 1/10W", Case/Package=0603, Max Op# temp °C=155, Min Op# Temp °C=-55, Power=100mW, Supplier Part Number=71-CRCW0603-3.3K-E3, Temp# Coeffiient (PPM/C)=100, Tolerance=1%, MFG1=VISHAY, MPN1=CRCW06033K30FKEA, Qualification=AEC-Q200, Supplier=Mouser, Supplier URL=https://www.mouser.it/ProductDetail/Vishay-Dale/CRCW06033K30FKEA?qs=1ghF3ZI8kS8fRqapjAj84Q%3D%3D&gad_source=1&gclid=EAIaIQobChMI4J_M0IWohAMVrUNBAh1qNACkEAAYBCAAEgIV-vD_BwE, Technology="Thick Film"
R400 R401 R402 R403: library part CRCW0402100RFKED, "Thick Film SM Chip Resistors, 100R, 0402, ±1%, 1/16W", Case/Package=0402, Max Op# temp °C=155, Min Op# Temp °C=-55, Power=63mW, Supplier Part Number=71-CRCW0402-100-E3, Temp# Coeffiient (PPM/C)=100, Tolerance=1%, Datasheet URL=https://www.vishay.com/docs/20035/dcrcwe3.pdf, MFG1=VISHAY, MPN1=CRCW0402100RFKED, Qualification=AEC-Q200, Supplier=Mouser, Supplier URL=https://www.mouser.it/ProductDetail/Vishay-Dale/CRCW0402100RFKED?qs=OlqPY1CiralT1EG%2F62gJpQ%3D%3D, Technology="Thick Film"
R404 R405: library part CRCW04021K00FKED, "Thick Film SM Chip Resistors, 1K, 0402, ±1%, 1/16W", Case/Package=0402, Max Op# temp °C=155, Min Op# Temp °C=-55, Power=63mW, Supplier Part Number=71-CRCW0402-1.0K-E3, Temp# Coeffiient (PPM/C)=100, Tolerance=1%, MFG1=VISHAY, MPN1=CRCW04021K00FKED, Qualification=AEC-Q200, Supplier=Mouser, Supplier URL=https://www.mouser.it/ProductDetail/Vishay-Dale/CRCW04021K00FKED?qs=YX%252BK5oaHNYqQ2WK%252BIAW12A%3D%3D, Technology="Thick Film"
TB300: library part TC2030-NL, "SWDIO pogo pin connector pads", ConnType="Board 2 Wire", MFG1=TAG_CONNECT, MPN1=TC2030-NL, Orientation=Vertical, Pitch=1.27mm, Terminal Type="Exposed Pads"
TP1 TP2 TP3 TP4: library part 20-2137, "Occhiello PTH, 1mm, Black, Plated", Case/Package=PTH, Color=Black, Supplier Part Number=101-2391, ConnType=TestProbe, Datasheet URL=https://docs.rs-online.com/56da/0900766b80c120b2.pdf, MFG1="Vero Tech Ltd", Mount=TH, MPN1=20-2137, Orientation=Radial, Pins=1, Supplier=RS, Supplier URL=https://it.rs-online.com/web/p/morsetti-terminali/1012391?searchId=bf2eecf7-719e-4693-ba83-d06578001651&gb=s
U100: library part NCV890430MW50TXG, "synchronous buck converter; 3.5-37Vin; 5Vout; 600mA", Case/Package=DFN-8, Frequency="2MHz / 1MHz", Max Input Voltage=37V, Max Op# temp °C=150°C, Max Ouput Current=600mA, Min Input Voltage=3.5V, Min Op# Temp °C=-40°C, Nominal Output Voltage=5V, Op Voltage=3.5-37V, Supplier Part Number=863-NCV890430MW50TXG, ComponentType="DCDC converter", Datasheet URL=https://www.onsemi.com/download/data-sheet/pdf/ncv890430-d.pdf, Max Duty Cycle=1, Max Supply Voltage (DC)=37V, MFG1=OnSemi, Min Supply Voltage=3.5V, MPN1=NCV890430MW50TXG, Qualification=AEC-Q100, Supplier=Mouser, Supplier URL=https://www.mouser.it/it/ProductDetail/onsemi/NCV890430MW50TXG?qs=OycAS1CGnlh8h8gdwAjytg%3D%3D, Switching Frequency="2MHz / 1MHz"
U101: library part TPS78433QWDRBRQ1, "TPS784-Q1 Automotive, 3.3V, 300mA, High-PSRR LDO", Case/Package="WSON-8 3x3", Max Op# temp °C=150, Min Op# Temp °C=-40, Out Voltage Accuracy=0.5%, Supplier Part Number=595-TPS78433QWDRBRQ1, Datasheet URL=https://www.ti.com/lit/gpn/tps784-q1, Dropout @ Imax (V)=0.08, Imax (mA)=300mA, MFG1=TI, MPN1=TPS78433QWDRBRQ1, Output Type=3.3V, Qualification=AEC-Q100, Quiescent cuttent(uA)=25, Supplier=Mouser, Supplier URL=https://www.mouser.it/ProductDetail/Texas-Instruments/TPS78433QWDRBRQ1?qs=iLbezkQI%252BsgJRXPFYNHjvQ%3D%3D, Vin Max (V)=6V, Vin Min (V)=1.7
U300: "MCU  Arm Cortex-M4 MCU 170 MHz -64 KB Flash", Case/Package=QFN32, Manufacturer_Name=STMicroelectronics, Mouser Part Number=511-STM32G431K8U6, Datasheet Link=https://www.st.com/resource/en/datasheet/stm32g431c6.pdf, Geometry.Height=0.6mm, Manufacturer_Part_Number=STM32G431K8U6, MFG1=STMicroelectronics, Mouser Price/Stock=https://www.mouser.co.uk/ProductDetail/STMicroelectronics/STM32G431K8U6?qs=sPbYRqrBIVmxpguskjGNNg%3D%3D, MPN1=STM32G431K8U6
U400: "IPS interface IC", Case/Package=TSSOP-16, Manufacturer_Name="Texas Instruments", Max Op# temp °C=160, Min Op# Temp °C=-40, Supplier Part Number=595-LDC5072EPWRQ1, Copyright="Copyright (C) 2026 Ultra Librarian. All rights reserved.", Datasheet URL=https://www.ti.com/lit/ds/symlink/ldc5072-q1.pdf?ts=1784869376494&ref_url=https%253A%252F%252Fwww.ti.com%252Fproduct%252FLDC5072-Q1, Manufacturer_Part_Number=LDC5072EPWRQ1, MFG1=TI, MPN1=LDC5072EPWRQ1, Qualification=AEC-Q100, RefDes=RefDes, Supplier=Mouser, Supplier URL=https://www.mouser.it/it/ProductDetail/Texas-Instruments/LDC5072EPWRQ1?qs=GBLSl2AkiruyHDEJhswGzQ%3D%3D, Type="Specialized Sensors"

## Via types
v1: diameter 0.6, hole 0.3, Top Layer to Bottom Layer, tented both sides, 43 vias
v2: diameter 0.5, hole 0.3, Top Layer to Bottom Layer, tented both sides, 9 vias
v3: diameter 0.3, hole 0.2, Top Layer to Bottom Layer, tented bottom, 4 vias
v4: diameter 0.6, hole 0.3, Top Layer to Bottom Layer, 2 vias

## Nets (pads, with @x,y where several pads share a name; then routed paths per layer and width w, separated by ;. In a path a pad name is that pad's centre, name@x,y a point inside that pad or via, vN(x,y) a via of type N, cw(c..) or ccw(c..) an arc to the next point about the centre after c; other vN are vias at no path point)
3V3: C107.1 D300.2 FB300.1 FB400.1 U101.1 | length 77.4
  Top Layer w0.3: D300.2 17.25,21.852 17.25,18.75 16,17.5 14.972,17.5 14.791,17.681 U101.1 14.553,17.469 C107.1 13.8,15.057 ccw(c14.3,15.057) v1(13.946,14.705) 15.955,12.695 cw(c8.361,5.098) 19.102,5.025 FB400.1 ; FB300.1 20.972,-19.795 22.455,-19.795 v1(22.5,-19.75)
  Bottom Layer w0.5: v1(13.946,14.705) 15.841,16.6 25.745,16.6 27.64,14.705 cw(c0.023,-0.017) 25.021,-18.847 24.854,-18.847 24.27,-19.431 22.846,-19.431 22.527,-19.75 v1(22.5,-19.75)
3V3_LDC: C400.1 C401.1 C402.1 FB400.2 R404.2 U400.14 U400.16 | length 21.1
  Top Layer w0.2: C400.1@19.925,-4.925 19.925,-5.575 20.075,-5.725 22.2,-5.725 22.375,-5.55 R404.2
  Top Layer w0.3: U400.16 21.475,-2.275 21.5,-2.3 ; U400.14 21.475,-0.975 21.5,-1
  Top Layer w0.5: FB400.2 C402.1 20.8,3.525 20.9,3.525 21.5,2.925 21.5,-1 21.5,-2.3 21.5,-3.725 ; C400.1@19.925,-4.925 21.207,-4.925 21.5,-4.632 21.5,-3.725 ; C401.1@19.925,-3.75 21.475,-3.75 21.5,-3.725
3V3_MCU: C302.1 C303.1 FB300.2 FB301.1 R300.2 R301.2 TB300.1 U300.1 U300.17 | length 42.7
  Top Layer w0.2: C303.1@15.326,-14.527 15.334,-14.566 15.583,-14.727 17.104,-14.404 17.134,-14.424 17.168,-14.416 U300.17 ; U300.1 23.088,-11.726 23.123,-11.719 23.182,-11.758 v1(23.93,-11.599) 24.678,-11.44 C302.1@24.927,-11.601 ; v1(24.5,-13.5) 24.547,-13.547 24.547,-14.41 TB300.1 ; R301.2 27.275,-10.618 R300.2@27.785,-10.95
  Top Layer w0.3: v1(14.543,-14.734) C303.1@15.334,-14.566 ; FB301.1@19.036,-20.112 v1(19.55,-20.445) FB300.2@20.063,-20.779
  Bottom Layer w0.3: v1(14.543,-14.734) 17.046,-17.237 17.046,-17.942 v1(19.55,-20.445) ; v1(24.5,-13.5) 24.5,-16.6 21.5,-19.6 21.5,-20.6 21.2,-20.9 20.004,-20.9 v1(19.55,-20.445) ; v1(27.228,-10.69) 24.839,-10.69 v1(23.93,-11.599) 22.001,-11.599 19.55,-14.05 v1(19.55,-20.445)
5V: C104.1 C105.1 C106.1 L100.2 U100.5 U101.7 U101.8 | length 10.8
  Top Layer w0.2: v1(6.2,20.8) 6.2,21.71 U100.5
  Top Layer w0.3: v1@10.115,21.057 11.186,20.438 12.572,19.638 U101.8
  Bottom Layer w0.4: v1(6.2,20.8) 6.2,20.85 8.45,23.1 v1(9.1,23.1) 9.6,22.6 9.6,21.6 v1(10.125,21.075)
AGC_EN: R404.1 R405.2 U400.8 | length 12.3
  Top Layer w0.2: R404.1 22.458,-4.117 22.458,-3.696 v2(22.954,-3.2) 23.434,-3.68 23.434,-4.134 R405.2 ; U400.8 25.975,2.275 26.563,2.863 26.563,3.288 v1(26.575,3.3)
  Bottom Layer w0.2: v2(22.954,-3.2) 22.9,-3.146 22.9,-0.375 v1(26.575,3.3)
BOOT0: R300.1 R302.2 U300.31 | length 8.3
  Top Layer w0.2: U300.31 v1@23.686,-13.892 ; R300.1 27.264,-11.908 27.209,-12.967 v1(27.232,-12.993) 27.918,-12.532 R302.2
  Bottom Layer w0.2: v1(23.707,-13.86) 23.74,-13.028 24.699,-12.142 24.705,-12.137 24.755,-12.087 24.841,-12.087 24.851,-12.087 26.494,-12.173 v1(27.232,-12.993)
Buck_SW: L100.1 U100.8 | length 0.2
  Top Layer w0.5: L100.1@6.24,26.24 L100.1
Buck_Vin: C101.1 C102.1 C103.1 L101.2 R100.2 R306.2 U100.1 | length 11.2
  Top Layer w0.2: L101.2 R306.2 ; v1(2.5,19.5) R100.2
  Bottom Layer w0.2: v1(-1.7,22.4) -1.7,21.5 0.3,19.5 v1@2.518,19.5
COS_N: C404.1 U300.6 U400.12 | length 14.9
  Top Layer w0.2: U400.12 v2(20.75,0.325) ; U300.6 v2@21.389,-9.753 ; v2(21.503,-9.589) 21.538,-8.915 ; 21.526,-8.901 C404.1@21.853,-8.398
  Bottom Layer w0.2: v2(20.75,0.325) 20.669,0.325 20.378,0.034 20.247,0.034 19.809,-0.404 19.809,-6.706 21.81,-8.706 21.81,-9.321 21.542,-9.589 v2(21.503,-9.589)
COS_P: C403.1 U300.5 U400.13 | length 14.6
  Top Layer w0.2: U400.13 v2(20.75,-0.325) ; U300.5 21.844,-9.97 v2@22.169,-9.988 ; v2@22.282,-9.998 C403.1@22.895,-9.054
  Bottom Layer w0.2: v2(20.75,-0.325) 20.709,-0.366 20.413,-0.366 20.209,-0.569 20.209,-6.54 22.21,-8.54 v2(22.21,-9.951)
DBG_LED1: R304.2 U300.19 | length 7.7
  Top Layer w0.2: R304.2 15.894,-18.908 15.894,-17.074 18.173,-14.795 U300.19
DBG_LED2: R305.2 U300.18 | length 9.1
  Top Layer w0.2: R305.2 13.952,-19.725 14.425,-19.725 15.475,-18.675 15.475,-16.801 17.754,-14.522 U300.18
ERR_LED: R303.2 U300.20 | length 9.4
  Top Layer w0.2: R303.2 16.325,-22.422 16.325,-17.334 18.592,-15.067 U300.20
GND: C100.2 C101.2 C102.2 C103.2 C104.2 C105.2 C106.2 C107.2 C200.2 C201.2 C300.2 C301.2 C302.2 C303.2 C400.2 C401.2 C402.2 C403.2 C404.2 C405.2 C406.2 C407.2 C408.2 C409.2 C410.2 C411.2 C412.2 D101.2 D200.2 D201.2 D300.1 DL300.1 DL301.1 DL302.1 Q200.2 Q201.2 R302.1 R307.1 R405.1 TB300.5 TP2.1 U100.3 U100.7 U100.9 U101.5 U101.9 U300.14 U300.16 U300.32 U300.33 U400.3 U400.9 U400.15 | length 320.1
  Top Layer w0.2: R307.1 3.725,28.225 4.82,27.13 U100.9 ; C106.2 C106.2@11.87,21.6 ; C303.2@15.149,-13.695 15.268,-13.577 15.923,-13.577 v1(16,-13.5) 16.077,-13.423 16.54,-13.423 16.867,-13.096 17.016,-13.096 U300.16 ; C301.2@16.26,-11.279 v1@16.94,-11.721 ; v1@16.953,-11.866 16.956,-11.868 U300.14@17.634,-12.308 ; v1(17,-11.8) v1@17.007,-11.8 ; C405.2@18.815,-8.484 18.415,-8.484 17.744,-7.813 17.578,-7.813 17.578,-7.522 17.932,-7.167 17.932,-6.068 18.825,-5.175 18.825,-5.135 19.035,-4.925 19.075,-4.925 19.075,-3.586 18.621,-3.132 18.621,-2.004 19.012,-1.612 U400.15@20.175,-1.612 ; v1(20.9,-16.5) 20.944,-16.544 23.167,-16.544 TB300.5 ; U300.32 23.084,-12.891 23.084,-12.741 23.4,-12.425 v1(23.4,-12.4) 24.9,-12.4 25.3,-12 C302.2@25.5,-12 ; C403.2@23.358,-8.341 23.282,-8.341 22.749,-7.808 22.627,-7.685 22.316,-7.685 23.601,-6.4 v1(24.7,-6.4) 24.7,-6.3 R405.1 ; C300.2@25.242,-9.328 25.264,-9.306 27.606,-9.306 28.128,-9.828 ; v1(28.6,-8.6) 28.6,-9.356 28.128,-9.828 ; R302.1 28.651,-10.351 28.128,-9.828
  Top Layer w0.3: DL302.1@9.323,-20.477 10.8,-22.753 10.812,-22.77 12.37,-25.171 DL300.1@12.373,-25.174 ; C106.2@11.87,21.6 11.87,22.12 13.379,23.629 D300.1 ; C402.2 20.75,5.55 21.4,6.2 23.2,6.2 ; C402.2@20.85,4.875 20.9,4.825 20.9,4.725 21.2,4.425 C411.2@22.175,4.425 ; v1(24.443,9.115) 23.2,7.872 23.2,6.2 ; C412.2@25.45,4.4 25.45,5.75 25,6.2 23.2,6.2
  Top Layer w0.5: D201.2 -3,-25.831 ; D200.2 0.75,-19.675 ; C201.2 -2.85,-25.981 -3,-25.831 ; C200.2 -2.85,-19.725 ; Q201.2@1.15,-26.231 0.75,-25.831 -3,-25.831 ; Q200.2@1.15,-20.075 0.75,-19.675 ; C103.2 4.545,22.45 U100.9 5.145,23.05 U100.7 7.65,23.05 7.7,23.1 ; C104.2 7.7,23.1 ; v1(8.2,19.9) 8.2,19.927 7.7,20.427 C105.2 7.7,23.1 ; DL302.1 8.493,-19.675 0.75,-19.675 ; v1(10.7,22.1) 10.719,22.081 11.138,22.081 11.649,21.569 C106.2 12.03,21.569 12.727,20.872 13.122,20.872 U101.5 13.95,20.044 U101.9 ; C107.2 12.674,16.93 13.475,17.731 13.475,17.956 13.568,18.049 13.568,18.309 v3(13.475,18.402) ; U400.9 19.563,2.288 20.787,2.288 v1(20.8,2.3) ; U400.15@20.175,-1.612 20.787,-1.612 v1(20.8,-1.6) ; v1(24.3,-1) 24.313,-0.987 25.437,-0.987 U400.3 ; v1(24.7,-6.4) 24.719,-6.419 25.277,-6.419 25.472,-6.614 25.661,-6.614 C408.2@25.714,-6.667 ; v1(25.3,-3.3) 25.319,-3.319 26.132,-3.319 26.185,-3.372 26.216,-3.372 26.339,-3.494 C407.2@26.339,-3.525 ; C409.2@28.05,-1.325 29.057,-1.325 30.9,0.518 30.9,2.3 v1(30.3,2.9) 29.375,1.975 C410.2@28.05,1.975
  Top Layer w0.8: D201.2 -10.669,-25.831 -26.377,-10.123 -26.377,-4 ; D200.2 -9.325,-19.675 -19.299,-9.701 -19.299,-4.701 -20,-4 -26.377,-4 ; C100.2 -3.6,21.4 ; C101.2 -3.6,21.4 ; C102.2@0.1,21.88 0.1,20.469 -0.369,20 -3.6,20 ; C102.2 0.12,21.92 1.37,21.92 C103.2 ; -26.377,-4 -26.377,4.123 -24.806,5.694 TP2.1 -18.905,8.039 -18.905,10.755 D101.2 -18.878,10.945 -10.923,18.9 -3.5,18.9 -3.6,19 -3.6,20 ; -3.6,20 -3.6,21.4
  Bottom Layer w0.2: v1(17,-11.8) 16.992,-11.808 16.992,-12.508 v1(16,-13.5) 16.5,-14 17.7,-14 v1(18.3,-13.4) 19.7,-12 v1(19.7,-11.2) ; v1(20.6,-15) 20.6,-16.092 20.9,-16.392 v1(20.9,-16.5) ; v1(22,-12.7) 22.992,-12.7 23.292,-12.4 v1(23.4,-12.4) 23.477,-12.323 23.982,-12.323 24.906,-11.4 27.7,-11.4 28.6,-10.5 v1(28.6,-8.6) 28.6,-7.4 30.3,-5.7 v1(30.3,2.9)
  Bottom Layer w0.4: 29.035,9.121 cw(c0.023,-0.017) v1(30.3,2.9)
  Bottom Layer w0.5: v1(10.7,22.1) 10.7,22.073 10.802,21.971 10.802,20.795 9.907,19.9 v1(8.2,19.9) 8.2,19.3 21.414,6.086 ; v1(24.3,-1) 24.3,-2.3 v1(25.3,-3.3) 23.7,-4.9 ; v1(24.7,-6.4) 24.7,-5.9 23.7,-4.9 ; 29.015,9.115 v1(24.443,9.115) 21.414,6.086 ; 21.414,6.086 20.8,5.472 v1(20.8,2.3) 20.819,2.281 20.981,2.281 21.377,1.885 21.377,-0.996 20.8,-1.573 v1(20.8,-1.6) 22.327,-3.127 22.327,-3.527 23.7,-4.9
  other v3: 14.448,18.938 13.452,19.513 14.425,20.048
INT_A: R200.1 U300.21 | length 27.5
  Top Layer w0.3: R200.1 4.7,-26.025 6.25,-27.575 12.45,-27.575 16.775,-23.25 16.775,-17.576 19.012,-15.339 U300.21
INT_B: R201.1 U300.22 | length 23.4
  Top Layer w0.3: R201.1 12.644,-28.156 17.25,-23.55 17.25,-17.793 19.431,-15.612 U300.22
NetC100_1: C100.1 D100.1 D101.1 L101.1 | length 32.2
  Top Layer w0.8: D100.1 -25.145,13.922 -15.267,23.8 -7.3,23.8 ; D100.1@-25.114,13.761 D101.1@-22.035,12.104 ; C100.1 -6.6,21.4 -7.3,22.1 -7.3,23.8 ; L101.1@-4.467,23.8 -7.3,23.8
NetDL300_2: DL300.2 R303.1 | length 1.4
  Top Layer w0.2: DL300.2 R303.1
NetDL301_2: DL301.2 R304.1 | length 1.4
  Top Layer w0.2: DL301.2 R304.1
NetDL302_2: DL302.2 R305.1 | length 1.4
  Top Layer w0.2: DL302.2 R305.1
NetQ200_1: Q200.1 R200.2 | length 2
  Top Layer w0.3: Q200.1@1.425,-22 R200.2
NetQ201_1: Q201.1 R201.2 | length 2.3
  Top Layer w0.3: Q201.1 R201.2
NetR100_1: R100.1 U100.4 | length 1.5
  Top Layer w0.2: R100.1 U100.4
NRST: C300.1 R301.1 TB300.3 U300.4 | length 11.6
  Top Layer w0.2: U300.4 22.013,-10.629 24.433,-10.114 24.467,-10.136 24.757,-10.074 24.779,-10.041 25.827,-10.721 26.184,-10.953 26.753,-13.632 26.261,-14.39 25.281,-14.598 24.805,-15.33 TB300.3
OUT_A: C200.1 D200.1 Q200.3 TP3.1 | length 31.9
  Top Layer w0.5: D200.1 -3,-22.775 ; C200.1 -2.85,-22.625 -3,-22.775 ; Q200.3 -1.15,-22.15 -1.775,-22.775 -3,-22.775
  Top Layer w0.8: TP3.1 -21.25,-9.75 -8.225,-22.775 D200.1
OUT_B: C201.1 D201.1 Q201.3 TP4.1 | length 39.8
  Top Layer w0.5: D201.1 -3,-28.931 ; C201.1 -2.85,-28.781 -3,-28.931 ; Q201.3 -1.15,-28.306 -1.775,-28.931 -3,-28.931
  Top Layer w0.8: TP4.1 -28.012,-10.488 -9.569,-28.931 D201.1
RX_COS_FILT_N: C410.1 R401.2 U400.6 | length 2.8
  Top Layer w0.2: U400.6 R401.2 C410.1@27.2,1.975
RX_COS_FILT_P: C409.1 R400.2 U400.4 | length 2.8
  Top Layer w0.2: U400.4 R400.2 C409.1@27.2,-1.325
RX_COS_N: P3.03 R401.1 | length 5.7
  Top Layer w0.2: R401.1 28.275,0.8 28.275,0.642 28.417,0.5 28.745,0.5 29.1,0.855 v1@29.1,0.9 ; P3.03@29.02,3.651 v1(29.161,2.946)
  Bottom Layer w0.2: v1@29.1,0.9 29.1,0.859 28.741,0.5 28.575,0.5 28.458,0.617 28.458,1.373 28.933,1.848 28.933,2.583 29.2,2.85 v1@29.2,2.9
  other v1: 29.1,0.975
RX_COS_P: P3.01 R400.1 | length 6.5
  Top Layer w0.2: P3.01@27.897,3.917 P3.01@28.123,3.691 ; P3.01@28.04,3.455 v1@28.18,2.75 ; R400.1 28.275,-0.15 28.275,-0.017 28.392,0.1 28.745,0.1 29.1,-0.255 v1@29.1,-0.3
  Bottom Layer w0.2: v1@28.2,2.7 28.216,2.7 28.533,2.383 28.533,2.013 28.058,1.538 28.058,0.451 28.409,0.1 28.741,0.1 29.1,-0.259 v1@29.1,-0.3
  other v1: 29.1,-0.325 28.18,2.85
RX_SIN_FILT_N: C412.1 R403.2 U400.7 | length 5.2
  Top Layer w0.2: U400.7 25.373,1.548 24.642,1.548 24.394,1.299 24.394,1.292 24.277,1.175 24.111,1.175 23.994,1.292 23.994,2.363 24.012,2.382 24.012,3.258 24.13,3.375 24.275,3.375 R403.2 C412.1@25.45,3.55
RX_SIN_FILT_P: C411.1 R402.2 U400.5 | length 5.9
  Top Layer w0.2: C411.1@22.175,3.575 22.2,3.55 R402.2 23.35,3.375 23.495,3.375 23.612,3.258 23.612,2.548 23.594,2.529 23.594,1.126 23.945,0.775 24.277,0.775 24.394,0.658 24.394,0.651 24.642,0.402 25.373,0.402 U400.5
RX_SIN_N: P3.04 R403.1 | length 8.7
  Top Layer w0.2: R403.1 24.275,4.625 24.13,4.625 24.012,4.742 24.012,5.062 v1(24.45,5.5) ; v1(28.068,8.438) P3.04@28.208,7.733 ; P3.04@28.077,7.428 P3.04@28.253,7.251
  Bottom Layer w0.2: v1(24.45,5.5) 24.373,5.577 24.181,5.577 24.012,5.745 24.012,5.911 24.616,6.514 26.892,6.514 27.778,7.401 27.778,8.121 28.068,8.411 v1(28.068,8.438)
RX_SIN_P: P3.02 R402.1 | length 8.9
  Top Layer w0.2: R402.1 23.35,4.625 23.495,4.625 23.612,4.742 23.612,5.062 v1(23.175,5.5) ; v1(27.087,8.243) 27.207,7.641 P3.02@27.228,7.538 ; P3.02@27.124,7.624 27.152,7.518 P3.02@27.272,7.056
  Bottom Layer w0.2: v1(23.175,5.5) 23.252,5.577 23.444,5.577 23.612,5.745 23.612,6.077 24.45,6.914 26.726,6.914 27.378,7.566 27.378,7.926 27.087,8.216 v1(27.087,8.243)
SIN_N: C406.1 U300.12 U400.10 | length 19.7
  Top Layer w0.2: C406.1@17.115,-8.525 16.665,-9.217 16.6,-10.475 v2(17.286,-10.921) ; v2@17.451,-11.034 U300.12 ; U400.10 v2(20.75,1.625)
  Bottom Layer w0.2: v2(17.286,-10.921) 17.229,-10.863 17.229,-10.621 16.781,-10.173 16.781,-9.676 17.881,-8.575 19.082,-7.374 19.082,0.475 20.107,1.5 20.544,1.5 20.669,1.625 v2(20.75,1.625)
SIN_P: C405.1 U300.11 U400.11 | length 17.1
  Top Layer w0.2: v2@17.61,-9.98 C405.1@18.118,-9.197 ; v2@17.685,-10.254 17.668,-10.58 U300.11 ; C405.1@18.108,-9.045 C405.1@18.159,-9.235 ; U400.11 v2(20.75,0.975)
  Bottom Layer w0.2: v2(17.649,-10.214) 17.591,-10.156 17.33,-10.156 17.181,-10.007 17.181,-9.842 18.047,-8.975 19.482,-7.54 19.482,0.309 20.273,1.1 20.544,1.1 20.669,0.975 v2(20.75,0.975)
SWCLK: TB300.4 U300.24 | length 9.4
  Top Layer w0.2: U300.24 19.889,-16.652 19.929,-16.837 23.763,-19.328 24.352,-19.202 25.294,-17.752 TB300.4
SWDIO: TB300.2 U300.23 | length 11.9
  Top Layer w0.2: U300.23 19.858,-15.829 19.498,-16.383 19.637,-17.038 23.699,-19.676 24.553,-19.494 26.082,-17.139 TB300.2
SWO: TB300.6 U300.26 | length 3.8
  Top Layer w0.2: U300.26 22.383,-16.026 23.208,-15.85 24.094,-16.426 TB300.6
TX_N: C408.1 P1.02 P1.04 U400.2 | length 9.5
  Top Layer w0.2: U400.2 25.373,-1.702 24.778,-1.702 24.731,-1.75 24.355,-1.75 23.967,-2.138 23.967,-2.469 23.978,-2.481 23.978,-3.807 25.386,-5.215 25.6,-5.215 25.717,-5.332 25.717,-5.671 C408.1@25.88,-5.833
  Top Layer w0.3: C408.1@25.88,-5.833 P1.04@27.284,-6.588 ; P1.04@27.205,-6.719 P1.04@27.272,-7.056
  Top Layer w0.4: P1.04@27.272,-6.8 27.272,-7.056 P1.02@28.253,-7.251
TX_P: C407.1 P1.01 P1.03 U400.1 | length 8
  Top Layer w0.2: U400.1 25.373,-2.198 24.778,-2.198 24.731,-2.15 24.521,-2.15 24.367,-2.304 24.378,-2.315 24.378,-3.642 25.551,-4.815 25.717,-4.815 C407.1@26.173,-4.359
  Top Layer w0.3: C407.1@26.173,-4.359 27.614,-4.359 27.897,-4.076 P1.03@27.897,-3.917
  Top Layer w0.4: P1.03@27.897,-3.917 P1.01@28.878,-4.113
V_SUPPLY: D100.2 TP1.1 | length 3.8
  Top Layer w0.8: TP1.1@-28.017,7.513 D100.2@-26.225,10.842
V_supply_sense: D300.3 R306.1 R307.2 U300.8 | length 68
  Top Layer w0.2: v4(18.5,-6.5) 20.25,-8.25 20.25,-9.663 19.987,-9.926 U300.8
  Top Layer w0.3: R306.1 R307.2 ; v4(0.175,28.25) 0.175,29.133 0.292,29.25 9.5,29.25 13.25,25.5 16.237,25.5 16.591,25.146 D300.3
  Bottom Layer w0.2: v4(0.175,28.25) 0.175,26.08 7.578,18.677 7.736,18.677 18.677,7.736 18.677,-6.215 18.5,-6.392 v4(18.5,-6.5)
VDDA_MCU: C301.1 FB301.2 U300.15 | length 11.8
  Top Layer w0.2: C301.1@15.883,-11.805 U300.15
  Top Layer w0.3: v1@14.765,-11.778 C301.1@15.85,-11.835 ; v1(18.693,-18.303) FB301.2@19.371,-18.744
  Bottom Layer w0.3: v1@14.754,-11.787 15.28,-12.371 15.174,-14.393 v1@18.694,-18.302
  other v1: 14.753,-11.788
pads on no net: P2.01 P2.02 P2.03 P2.04 TB300. U100.2 U100.6 U101.2 U101.3 U101.4 U101.6 U300.2 U300.3 U300.7 U300.9 U300.10 U300.13 U300.25 U300.27 U300.28 U300.29 U300.30

## Polygon pours and split planes (outlines as drawn)
Buck_Vin on Top Layer "NONET_L-01_P-001" (solid, pour order 4): -3,25.221 -3,22.5 ccw(c-2.75,22.5) -2.75,22.25 -2.598,22.25 cw(c-2.598,22.052) -2.4,22.052 -2.4,21 ccw(c-2.15,21) -2.15,20.75 -1.25,20.75 ccw(c-1.25,21) -1,21 -1,23.088 cw(c-0.838,23.088) -0.838,23.25 2.35,23.25 ccw(c2.35,23.4) 2.5,23.4 cw(c2.6,23.4) 2.6,23.5 3.8,23.5 ccw(c3.8,23.7) 4,23.7 4,25.3 ccw(c3.8,25.3) 3.8,25.5 -2.721,25.5 ccw(c-2.721,25.221)
Buck_SW on Top Layer "NONET_L-01_P-001" (solid, pour order 3): 5.95,23.45 6.65,23.45 ccw(c6.65,23.625) 6.825,23.625 6.825,24.275 cw(c6.975,24.275) 6.975,24.425 7.15,24.425 ccw(c7.15,24.65) 7.375,24.65 7.375,28.05 ccw(c7.175,28.05) 7.175,28.25 5.625,28.25 ccw(c5.625,28.025) 5.4,28.025 5.4,24.55 ccw(c5.525,24.55) 5.525,24.425 cw(c5.525,24.225) 5.725,24.225 5.725,23.675 ccw(c5.95,23.675)
5V on Top Layer "NONET_L-01_P-001" (solid, pour order 0): 8,28.25 9.25,28.25 cw(c9.25,27.75) 9.75,27.75 9.75,21.5 cw(c9.5,21.5) 9.5,21.25 8.725,21.25 cw(c8.725,21.475) 8.5,21.475 8.5,24.5 8,24.5 cw(c8,25) 7.5,25 7.5,27.75 cw(c8,27.75)
GND on Bottom Layer "NONET_L-01_P-001" (solid, pour order 13): 13,20.4 14.9,20.4 14.9,18.2 13,18.2

## Keep-outs
Keep-Out Layer:
  circle w0.5: c22,12 r3
  circle w0.5: c0,0 r18.2
  circle w0.5: c-22.6,0 r3